# Altium PCB MicroLedController.PcbDoc
Units mm, origin at the board's own origin, x right, y up, seen from the top; angles counter-clockwise.
Board outline 51.07 x 23.13 mm, 2 copper layers (Top, Bottom), stack 0.27 mm thick; 35 components, 28 nets, 154 pads, 55 vias.
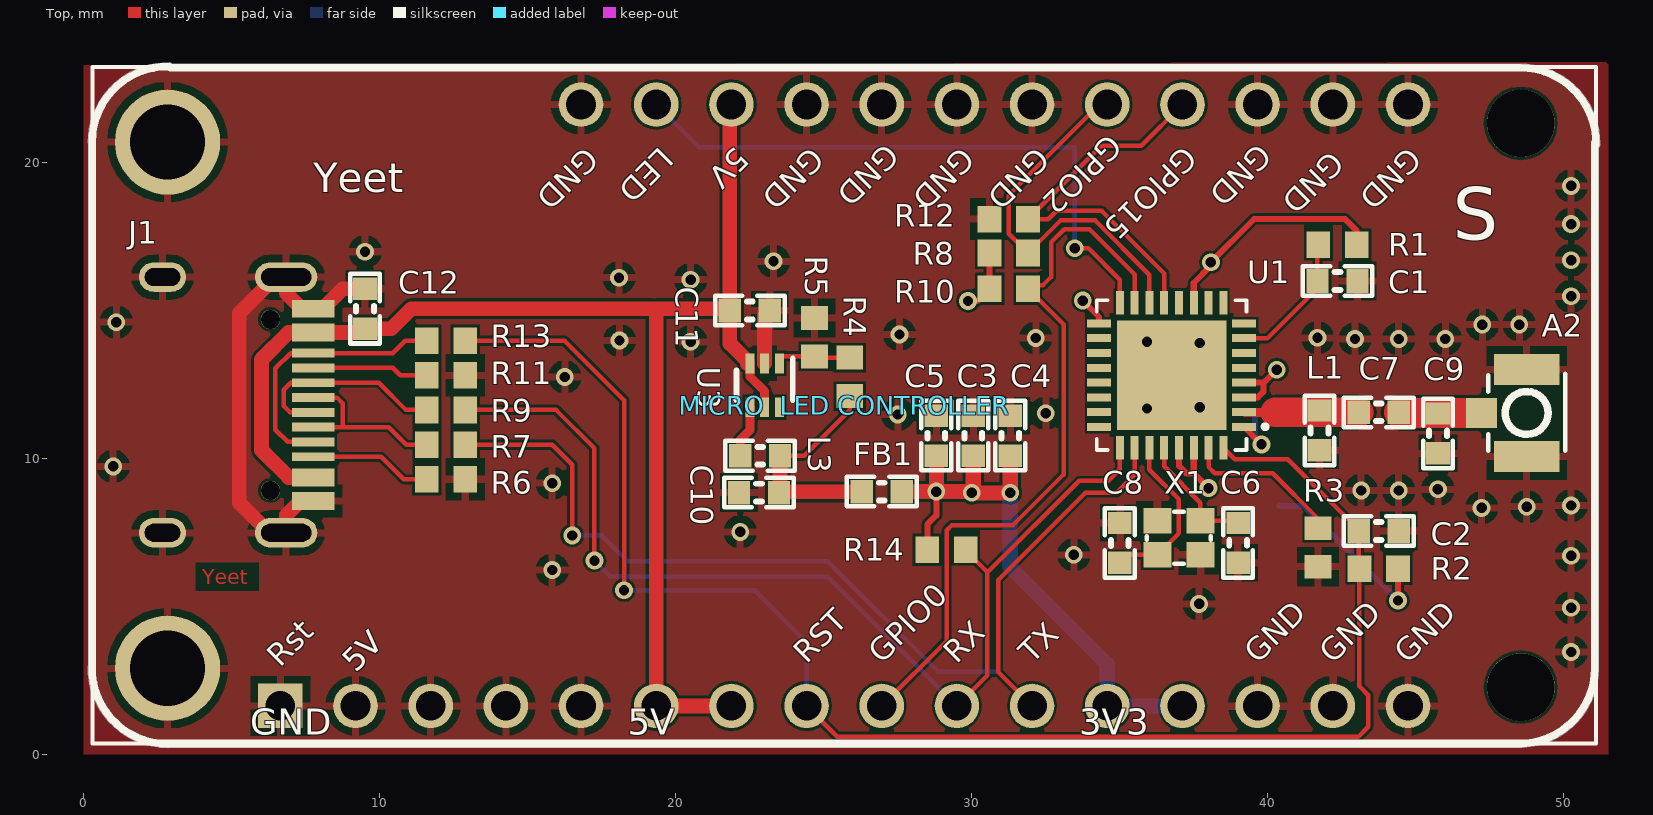
[diagram p0: Top view]
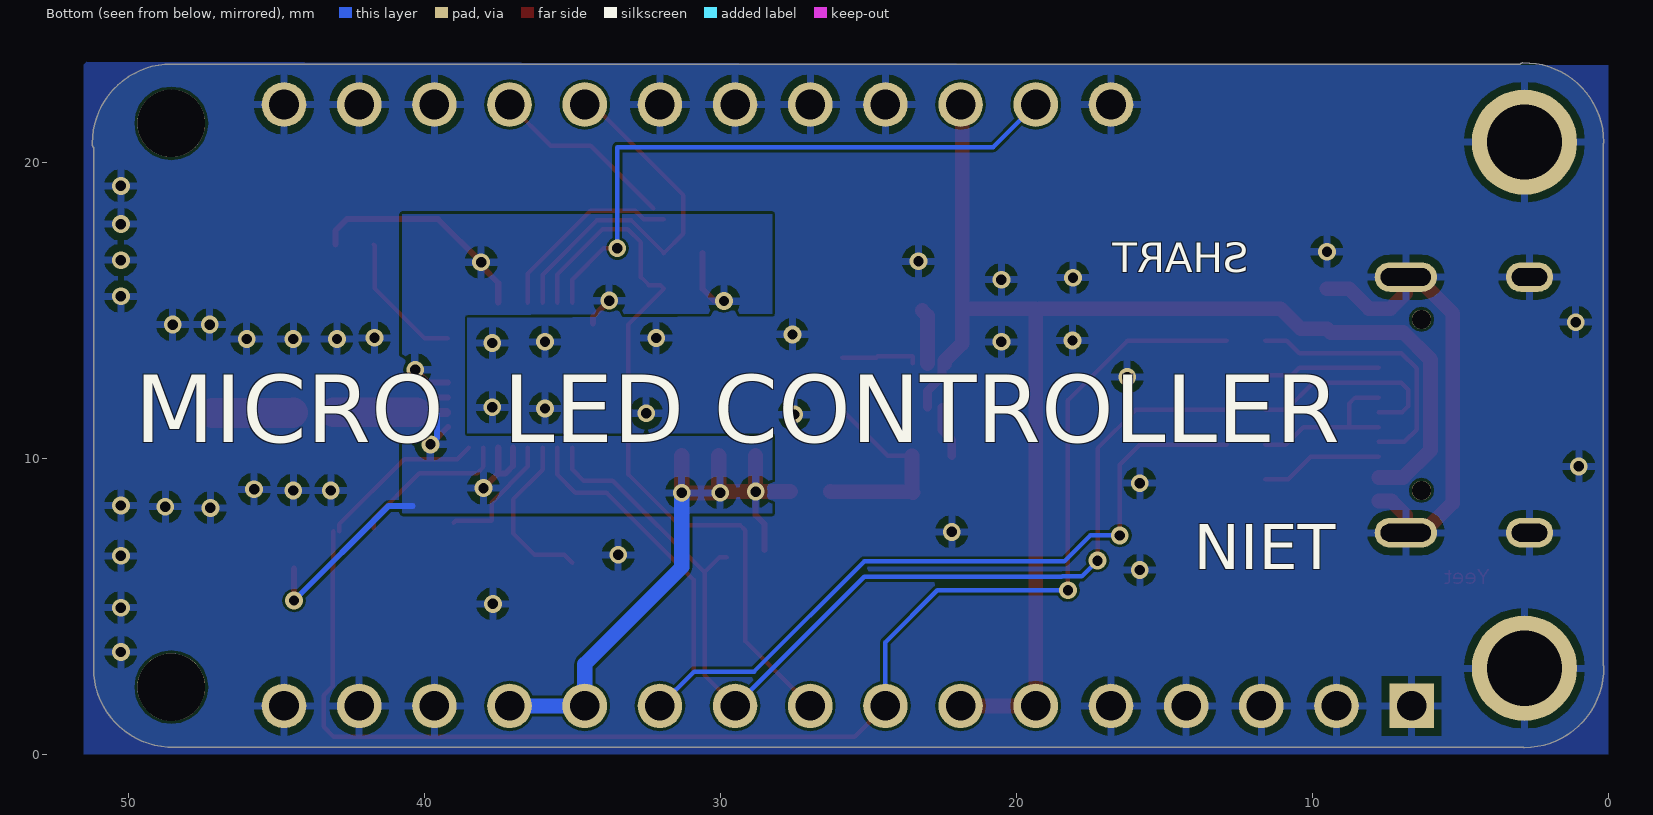
[diagram p1: Bottom view, seen from below]
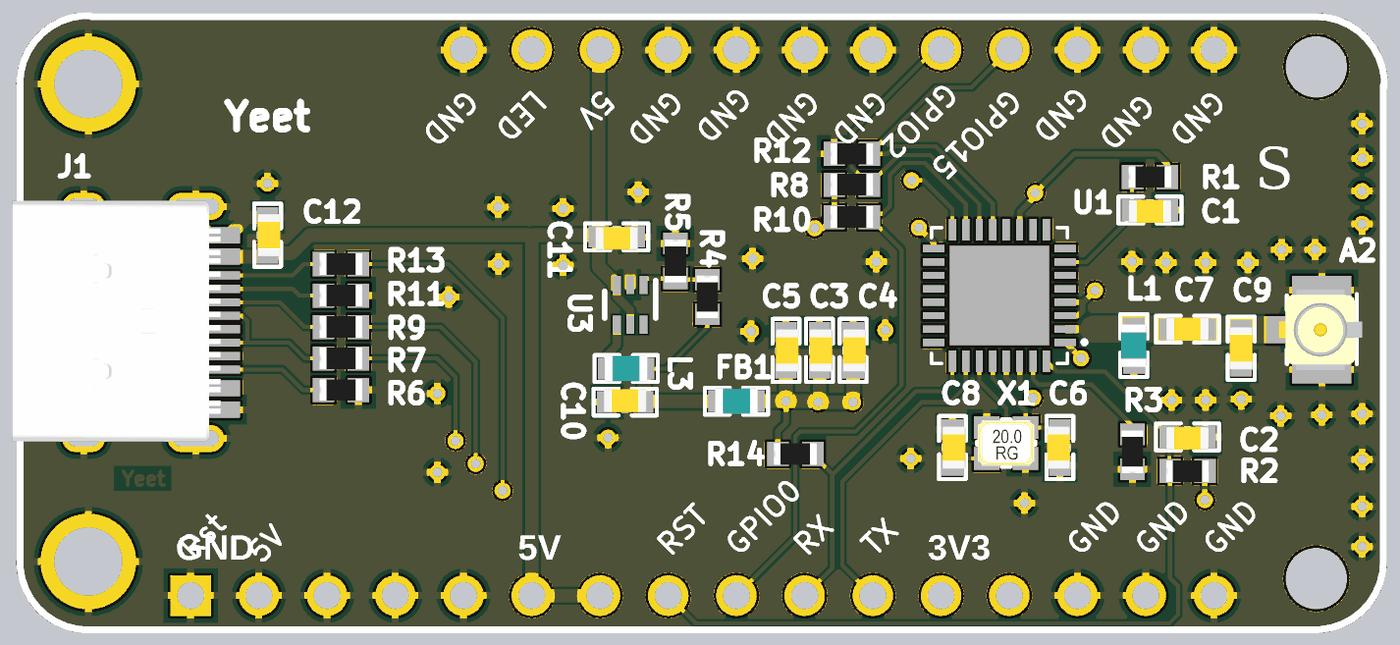
[diagram p2: 3D render of the assembled board from above, using the file's embedded part models]

## Layer stack, top to bottom
Top Solder: solder mask 0.0102, Solder Resist, Dk 3.5
Top: signal copper 0.035
Prepreg: core 0.2, 7628, Dk 4.2
Bottom: signal copper 0.035
Bottom Solder: solder mask 0.0102, Solder Resist, Dk 3.5

## Board outline
2.828,0.232 cw(c2.828,2.91) 0.15,2.964 cw(c0.278,2.961) 0.16,3.01 0.16,20.64 cw(c0.277,20.69) 0.15,20.69 cw(c2.828,20.69) 2.881,23.367 cw(c2.879,23.24) 2.97,23.329 48.538,23.329 cw(c48.538,20.651) 51.215,20.651 cw(c48.538,20.651) 51.215,20.597 cw(c51.088,20.6) 51.175,20.508 51.175,2.92 cw(c48.498,2.92) 48.446,0.243 cw(c48.498,2.92) 48.444,0.243 48.446,0.243 2.878,0.243 cw(c2.828,0.36)

## Design rules (kind name [scope] priority, off if disabled: settings)
Clearance [All] p1: gap=0.089 ignorepadtopadclearanceinfootprint=TRUE
ComponentClearance [All] p1 off: gap=0.254 collisioncheckmode=3 verticalgap=0.254 showdistances=FALSE
DiffPairsRouting [All] p1: maxlimit=0.254 minlimit=0.089 mostfreqgap=0.2 toplayer_minwidth=0.089 toplayer_maxwidth=0.381 toplayer_prefwidth=0.15 bottomlayer_minwidth=0.089 bottomlayer_maxwidth=0.381 bottomlayer_prefwidth=0.15 maxuncoupledlength=12.7
MatchedLengths usb [All] p1: tolerance=1 checknetsindiffpair=FALSE checkdiffpairvsdiffpair=TRUE checkxsignals=TRUE checkothers=TRUE
PolygonConnect [All] p1: connectstyle=Relief reliefconductorwidth=0.254 reliefentries=4 polygonreliefangle="90 Angle" airgapwidth=0.254
RoutingVias [All] p1: holewidth=0.35 width=0.6 viastyle="Through Hole" minholewidth=0.2 minwidth=0.45 maxholewidth=6.3 maxwidth=1.27
SolderMaskExpansion [All] p1: expansion=0.102 istentingtop=FALSE
Width [All] p1: maxlimit=1 minlimit=0.127 preferedwidth=0.2
28 further rules are at their usual default settings.

## Components (designator, comment, footprint, x,y, rotation, side; value= is the part's Value field where it differs from the comment)
A2 "U.FL-R-SMT-1" "COAXIAL RF U.FL-R-SMT-1" 48.75,11.538 r270 top locked
C1 "100nF" C0603 42.355,15.997 r180 top value=100pF
C2 "100nF" C0603 43.75,7.548 r180 top value=100pF
C3 "1uF" C0603 30.05,10.769 r270 top value=100pF
C4 "100nF" C0603 31.3,10.769 r270 top value=100pF
C5 "1uF" C0603 28.8,10.769 r270 top value=100pF
C6 "10pF" C0603 39,7.15 r90 top locked value=100pF
C7 "8.2pF" CAPC1608X06L 43.75,11.56 r0 top locked value=100pF
C8 "10pF" C0603 35,7.15 r270 top locked value=100pF
C9 "2.4pF" CAPC1608X06L 45.75,10.85 r90 top locked value=100pF
C10 "22uF" C0603 22.814,8.847 r0 top value=100pF
C11 "4.7uF" C0603 22.5,14.997 r180 top value=100pF
C12 "10uF" C0603 9.5,15.06 r270 top locked value=100pF
FB1 "Ferrite" IND0603 26.958,8.88 r180 top value=120R/0.55A
J1 "USB-C" TYPE-C-31-M-12 7.75,15.06 r270 top locked
L1 "1.5nH" IND0603 41.75,10.95 r90 top locked value=120R/0.55A
L3 "1uH" IND0603 22.85,10.093 r0 top value=120R/0.55A
"MICRO  LED CONTROLLER" "2821" *XCVR_2821 25.688,11.8 r0 top (schematic designator U2)
R1 "10K" RES0603R 42.355,17.228 r0 top value=0R
R2 "10K" RES0603R 43.75,6.278 r0 top value=0R
R3 "12K" RES0603R 41.7,6.995 r90 top value=0R
R4 "453K" RES0603R 25.875,12.76 r270 top value=0R
R5 "100K" RES0603R 24.685,14.097 r270 top value=0R
R6 "1K" RES0603R 12.235,9.298 r0 top locked value=0R
R7 "0R" RES0603R 12.235,10.469 r0 top locked
R8 "10K" RES0603R 31.25,16.941 r0 top value=0R
R9 "0R" RES0603R 12.235,11.64 r0 top locked
R10 "10K" RES0603R 31.25,15.735 r0 top value=0R
R11 "1K" RES0603R 12.235,12.811 r0 top locked value=0R
R12 "10K" RES0603R 31.25,18.087 r0 top value=0R
R13 "0R" RES0603R 12.235,13.982 r0 top locked
R14 "100K" RES0603R 29.15,6.916 r0 top value=0R
U1 "ESP8285" *QFN50P500X500X80-33N 36.75,12.813 r180 top locked
U3 "TLV62568ADRLR" DRL0006A 23,12.473 r270 top value=N/A
X1 "26MHZ" BT-XTAL_2016 37,7.32 r0 top locked value=32MHz

## Footprints (in the part's own frame and the unit in brackets; to place one, negate y for a bottom-side part, rotate by r counter-clockwise, add the part's x,y. Pads: shape width x height; smd on the part's side, far side on the other; paste and mask are expansions set on the pad)
*QFN50P500X500X80-33N [mm]
  rect 0.8x0.27 smd: 1(-2.45,1.75) 2(-2.45,1.25) 3(-2.45,0.75) 4(-2.45,0.25) 5(-2.45,-0.25) 6(-2.45,-0.75) 7(-2.45,-1.25) 8(-2.45,-1.75) 17(2.45,-1.75) 18(2.45,-1.25) 19(2.45,-0.75) 20(2.45,-0.25) 21(2.45,0.25) 22(2.45,0.75) 23(2.45,1.25) 24(2.45,1.75)
  rect 0.27x0.8 smd: 9(-1.75,-2.45) 10(-1.25,-2.45) 11(-0.75,-2.45) 12(-0.25,-2.45) 13(0.25,-2.45) 14(0.75,-2.45) 15(1.25,-2.45) 16(1.75,-2.45) 25(1.75,2.45) 26(1.25,2.45) 27(0.75,2.45) 28(0.25,2.45) 29(-0.25,2.45) 30(-0.75,2.45) 31(-1.25,2.45) 32(-1.75,2.45)
  rect 3.7x3.7 smd: 33(0,0)
  silkscreen extent -3.24,-2.53 2.53,2.53, body extent -2.53,-2.53 2.53,2.53, height 0.85
*XCVR_2821 [mm]
  rect 1.508x1.508 hole 1: 1(-19.05,-10.16)
  round 1.508 hole 1: 2(-16.51,-10.16) 3(-13.97,-10.16) 4(-11.43,-10.16) 5(-8.89,-10.16) 6(-6.35,-10.16) 7(-3.81,-10.16) 8(-1.27,-10.16) 9(1.27,-10.16) 10(3.81,-10.16) 11(6.35,-10.16) 12(8.89,-10.16) 13(11.43,-10.16) 14(13.97,-10.16) 15(16.51,-10.16) 16(19.05,-10.16) 17(-8.89,10.16) 18(-6.35,10.16) 19(-3.81,10.16) 20(-1.27,10.16) 21(1.27,10.16) 22(3.81,10.16) 23(6.35,10.16) 24(8.89,10.16) 25(11.43,10.16) 26(13.97,10.16) 27(16.51,10.16) 28(19.05,10.16)
  round 2.286 hole 2.286 unplated: None(22.86,-9.525) None(22.86,9.525)
  round 3.556 hole 2.54: S1(-22.86,-8.89) S2(-22.86,8.89)
  silkscreen extent -25.4,-11.43 25.4,11.43
BT-XTAL_2016 [mm]
  rect 0.95x0.85 smd: 1(-0.725,-0.575) 2(0.725,-0.575) 3(0.725,0.575) 4(-0.725,0.575)
  silkscreen extent -1.08,-0.88 1.08,0.88, body extent -1.05,-0.85 1.05,0.85, height 0.56
C0603 [mm]
  rect 0.75x0.8 smd: 1(-0.675,0) 2(0.675,0)
  silkscreen extent -1.17,-0.5 1.17,0.5, body extent -0.8,-0.38 0.8,0.48, height 0.8
CAPC1608X06L [mm]
  rect 0.75x0.8 smd: 1(-0.675,0) 2(0.675,0)
  silkscreen extent -1.17,-0.5 1.17,0.5, body extent -0.8,-0.43 0.8,0.43, height 0.8
"COAXIAL RF U.FL-R-SMT-1" [mm]
  rect 1x1.05 smd: 1(0,-1.525)
  rect 1.05x2.2 smd: 2(-1.475,0) 2(1.475,0)
  Top pour cut-out: 0.85,1.3 -0.85,1.3 -0.85,-1.525 0.85,-1.525
  silkscreen extent -1.32,-1.3 1.28,1.3, body extent -1.5,-1.6 1.5,1.5, height 1.25
DRL0006A [mm]
  rect 0.67x0.3 smd paste+0 mask+0.051: 1(-0.74,0.5) 2(-0.74,0) 3(-0.74,-0.5) 4(0.74,-0.5) 5(0.74,0) 6(0.74,0.5)
  silkscreen extent -0.9,-0.95 0.5,0.95, body extent -0.76,-0.76 0.76,0.89, height 0.25
IND0603 [mm]
  rect 0.75x0.8 smd: 1(-0.675,0) 2(0.675,0)
  silkscreen extent -1.17,-0.5 1.17,0.5, body extent -0.8,-0.48 0.8,0.48, height 0.8
RES0603R [mm] "resistor 0603 reflow soldering"
  rect 0.8x0.9 smd: 1(-0.65,0) 2(0.65,0)
  body extent -0.8,-0.4 0.8,0.4, height 0.45
TYPE-C-31-M-12 [mm]
  rect 0.6x1.45 smd: 1(0,0) 1(6.5,0) 2(0.8,0) 2(5.7,0)
  rect 0.3x1.45 smd: 3(1.5,0) 4(2,0) 5(2.5,0) 6(3,0) 7(3.5,0) 8(4,0) 9(4.5,0) 10(5,0)
  oval 1x2.1 hole 1.7 slot 0.6 at 0 deg: 11(-1.07,-0.915) 11(7.57,-0.915)
  oval 1x1.6 hole 1.2 slot 0.6 at 0 deg: 11(-1.07,-5.095) 11(7.57,-5.095)
  round 0.65 hole 0.65: 12(0.36,-1.445) 12(6.14,-1.445)
  body extent -1.27,-7.75 7.68,0, height 3.27

## Part data
A2: "ONN U.FL RCPT STR 50 OHM SMD", Manufacturer="Hirose Electric Co Ltd", Part number IPS=N.A., Supplier Part Number 1=H11891DKR-ND, Artikkelnr Noca=N.A., ComponentLink1Description=Datasheet, ComponentLink1URL=https://media.digikey.com/pdf/Data%20Sheets/Hirose%20PDFs/UFL%20Series.pdf, ComponentLink2Description="Supplier link", Footprint Doc="COAXIAL RF U.FL-R-SMT-1", LatestRevisionDate=2018-05-07, Manufacturer Part Number=U.FL-R-SMT-1, Part Number=U.FL-R-SMT-1, Pin Count=3, Published=2018-05-07, Publisher="Nordic Semiconductor", Supplier 1=Digi-Key
C1 C2 C3 C4 C5 C6 C7 C8 C9 C10 C11 C12: library part CAP, "Capacitor", Published=8-Jun-2000, Publisher="Altium Limited", Revision="July-2002: Re-released for DXP Platform."
FB1: "Ferrite Bead, 120 Ohm @ 100MHz, 500mA, 250 mOhm Max", Manufacturer=Murata, Manufacturer Part Number=BLM15AG121SN1D, Part Number=FB0402-120R@100M-500mA, Part number IPS=N.A., Supplier Part Number 1=490-1005-1-ND, Artikkelnr Noca=33029317, ComponentLink1Description=Datasheet, ComponentLink2Description="Supplier link", Footprint Doc=0402, HelpURL=http://search.murata.co.jp/Ceramy/image/img/PDF/ENG/L0110S0100BLM15A_SN.pdf, LatestRevisionDate=2014-01-10, Note="Chip EMIFIL Inductor Type Chip Ferrite Bead", Pin Count=2, Published=2011-11-14, Publisher="Nordic Semiconductor", Supplier 1=Digi-Key, Supplier 2=Farnell, Supplier Part Number 2=151-5760
L1 L3: "Inductor", Manufacturer=Murata, Manufacturer Part Number=BLM15AG121SN1D, Part Number=FB0402-120R@100M-500mA, Part number IPS=N.A., Supplier Part Number 1=490-1005-1-ND, Artikkelnr Noca=33029317, ComponentLink1Description=Datasheet, ComponentLink2Description="Supplier link", Footprint Doc=0402, HelpURL=http://search.murata.co.jp/Ceramy/image/img/PDF/ENG/L0110S0100BLM15A_SN.pdf, LatestRevisionDate=2014-01-10, Note="Chip EMIFIL Inductor Type Chip Ferrite Bead", Pin Count=2, Published=2011-11-14, Publisher="Nordic Semiconductor", Supplier 1=Digi-Key, Supplier 2=Farnell, Supplier Part Number 2=151-5760
"MICRO  LED CONTROLLER": "Adafruit Feather HUZZAH with ESP8266 WiFi", Package=None, Availability=Unavailable, MF="Adafruit Industries", MP=2821, Price=None, SnapEDA_Link=https://www.snapeda.com/parts/2821/Adafruit%20Industries%20LLC/view-part/?ref=snap
R1 R2 R3 R4 R5 R6 R7 R8 R9 R10 R11 R12 R13 R14: "Resistor, ±5%, 0.05W", Part Number=R0201-0R, Part number IPS=00000003245, Artikkelnr Noca=N.A., ComponentLink1Description=Datasheet, ComponentLink2Description="Supplier link", Footprint Doc=0201, LatestRevisionDate=2017-11-09, Note="Chip Res 5%", Pin Count=2, Published=2014-11-13, Publisher="Nordic Semiconductor"
U1: library part ESP8266EX, "ESP8266EX", Package="VFQFN-32 Espressif Systems", Availability=Unavailable, ComponentLink1Description=datasheet, ComponentLink1URL=https://www.espressif.com/sites/default/files/documentation/0a-esp8285_datasheet_en.pdf, MF="Espressif Systems", MP=ESP8266EX, Price=None, SnapEDA_Link=https://www.snapeda.com/parts/ESP8266EX/Espressif%20Systems/view-part/555861/?ref=snap
U3: Manufacturer Name="Texas Instruments", Manufacturer Part Number=TLV62568ADRLR, PackageReference=TLV62568ADRLR
X1: "X201626MOD4SI", Manufacturer=Golledge, Manufacturer Part Number=MP06003, Part Number=XTAL_SMD2016_32MHz_8pF_Golledge, Part number IPS=N.A., Artikkelnr Noca=22010050, ComponentLink1Description=Datasheet, ComponentLink2Description="Supplier link", Footprint Doc=XTAL_2016, HelpURL=\\hizz\pro\app9717\Datasheet\crystals\Golledge\mp06003.pdf, LatestRevisionDate=2016-11-02, Note="XTAL SMD 32.000MHz", Pin Count=4, Published=2016-11-02, Publisher="Nordic Semiconductor", Supplier 1="Link Nordic"

## Via types
v1: diameter 0.6, hole 0.35, Top to Bottom, 55 vias

## Nets (pads, with @x,y where several pads share a name; then routed paths per layer and width w, separated by ;. In a path a pad name is that pad's centre, name@x,y a point inside that pad or via, vN(x,y) a via of type N, cw(c..) or ccw(c..) an arc to the next point about the centre after c; other vN are vias at no path point)
3.3V: C10.2 FB1.2 L3.2 R4.2 | length 7.5
  Top w0.152: L3.2 24.343,10.093 25.875,11.625 R4.2
  Top w0.5: C10.2 C10.2@23.515,8.874 ; L3.2 23.525,8.884 C10.2@23.515,8.874 ; FB1.2 26.276,8.874 C10.2@23.515,8.874
3V3: "MICRO  LED CONTROLLER.12" "MICRO  LED CONTROLLER.13" C3.2 C4.2 C5.2 FB1.1 R1.2 R2.2 R8.1 R10.1 R14.1 U1.1 U1.3 U1.4 U1.11 U1.17 U1.29 U1.30 | length 45.1
  Top w0.203: 28.403,8.88 28.475,8.808 ; R14.1 28.5,7.779 28.8,8.079 v1(28.8,8.88) ; v1(29.873,15.319) 30.184,15.319 R10.1 R8.1 ; v1(33.75,15.335) 34.3,14.785 U1.17 ; U1.29 37,9.75 37.25,9.5 37.5,9.5 ; U1.30 37.5,9.5 ; U1.11 37.5,15.93 38.08,16.51 v1(38.08,16.63) 39.537,18.087 42.613,18.087 43.005,17.695 R1.2 ; v1(38,9) 37.5,9.5 ; U1.1 v1(39.787,10.476) ; U1.3 39.663,12.063 39.85,12.25 39.85,12.5 39.787,12.563 ; U1.4 39.787,12.563 ; v1(40.307,13) 39.87,12.563 39.787,12.563 ; v1(44.4,5.2) R2.2
  Top w0.508: FB1.1 28.403,8.88 v1(28.8,8.88) ; C5.2 v1(28.8,8.88) ; C3.2 30.05,8.89 v1(30,8.84) ; C4.2 v1(31.3,8.84) v1(30,8.84) ; v1(28.8,8.88) 29.96,8.88 v1(30,8.84)
  Bottom w0.203: 39.575,11.51 39.575,10.688 v1(39.787,10.476) ; 40.4,8.397 41.203,8.397 v1(44.4,5.2)
  Bottom w0.508: v1(31.3,8.84) 31.3,6.326 34.578,3.048 34.578,1.64 37.118,1.64
5V: "MICRO  LED CONTROLLER.6" "MICRO  LED CONTROLLER.7" "MICRO  LED CONTROLLER.19" C11.2 C12.2 J1.2 U3.3 U3.5 | length 48.3
  Top w0.3: U3.3 22.5,12.77 23,12.27 U3.5
  Top w0.5: J1.2@7.75,9.36 6.915,9.36 6,10.275 6,13.345 6.915,14.26 7.75,14.26 9.375,14.26 C12.2 10.385,14.385 11.06,15.06 19.2,15.06 ; 21.878,1.64 19.338,1.64 19.338,15.06 21.762,15.06 C11.2 ; 21.878,21.96 21.825,21.907 C11.2 ; U3.3@22.411,13.213 22.411,13.302 21.825,13.888 C11.2
EN: C1.2 R1.1 U1.7 | length 4.7
  Top w0.152: U1.7 39.989,14.063 41.68,15.754 C1.2 41.68,17.203 R1.1
GND: "MICRO  LED CONTROLLER.1" "MICRO  LED CONTROLLER.2" "MICRO  LED CONTROLLER.3" "MICRO  LED CONTROLLER.4" "MICRO  LED CONTROLLER.5" "MICRO  LED CONTROLLER.14" "MICRO  LED CONTROLLER.15" "MICRO  LED CONTROLLER.16" "MICRO  LED CONTROLLER.17" "MICRO  LED CONTROLLER.20" "MICRO  LED CONTROLLER.21" "MICRO  LED CONTROLLER.22" "MICRO  LED CONTROLLER.23" "MICRO  LED CONTROLLER.26" "MICRO  LED CONTROLLER.27" "MICRO  LED CONTROLLER.28" "MICRO  LED CONTROLLER.S1" "MICRO  LED CONTROLLER.S2" A2.2 C1.1 C2.1 C3.1 C4.1 C5.1 C6.1 C8.1 C9.1 C10.1 C11.1 C12.1 J1.1 J1.11 L1.1 R3.1 R5.1 R6.2 R11.2 R12.1 U1.33 U3.2 X1.2 X1.4 | length 17.8
  Top w0.5: J1.1@7.75,8.56 7.31,8.56 6.835,8.085 6.835,7.49 6.26,7.49 5.25,8.5 5.25,14.91 6.47,16.13 6.835,16.13 6.835,15.58 7.355,15.06 7.75,15.06 8.075,15.06 8.75,15.735 C12.1 ; U3.2 23,14.822 C11.1
  other v1: 50.25,3.46 50.25,4.96 37.681,5.087 15.824,6.231 50.25,6.71 33.449,6.745 22.175,7.519 47.225,8.33 48.75,8.37 50.25,8.41 43.155,8.92 44.425,8.92 45.75,8.96 15.824,9.165 0.988,9.732 27.5,11.485 32.5,11.53 35.92,11.691 37.7,11.731 16.25,12.755 37.7,13.902 20.5,13.942 35.92,13.942 18.098,13.985 42.95,14.038 44.425,14.038 46,14.038 32.165,14.069 41.68,14.078 27.559,14.191 47.25,14.523 48.5,14.523 1.094,14.606 50.25,15.478 20.5,16.041 18.082,16.108 23.302,16.663 50.25,16.7 9.5,16.985 50.25,17.92 50.25,19.21
GPIO0: "MICRO  LED CONTROLLER.9" R10.2 U1.15 | length 25.1
  Top w0.152: 26.978,1.64 26.958,1.64 29.15,3.832 29.15,7.569 29.33,7.75 31.393,7.75 33.1,9.457 33.1,14.535 R10.2 32.025,15.86 32.407,15.86 32.677,16.13 32.677,17.302 33.125,17.75 33.975,17.75 35.5,16.225 U1.15
GPIO2: "MICRO  LED CONTROLLER.24" R8.2 U1.14 | length 13.1
  Top w0.152: 34.578,21.96 34.31,21.96 31.25,18.9 31.25,17.591 R8.2 33,18.041 34.172,18.041 36,16.213 U1.14
GPIO12: U1.10
GPIO13: U1.12
GPIO14: U1.9
GPIO15: "MICRO  LED CONTROLLER.25" R12.2 U1.13 | length 12.9
  Top w0.152: R12.2 32.587,18.087 32.866,18.366 34.384,18.366 36.5,16.25 U1.13 ; R12.2@32.263,18.45 34.376,20.563 35.721,20.563 37.118,21.96
GPIO16: U1.8
LED: "MICRO  LED CONTROLLER.18" U1.16 | length 20.9
  Top w0.152: v1(33.475,17.1) 33.941,17.1 35,16.041 U1.16
  Bottom w0.152: 19.338,21.96 20.775,20.523 33.475,20.523 v1(33.475,17.1)
NetA2_1: A2.1 C7.2 C9.2 | length 2.7
  Top w1: C7.2 44.447,11.538 A2.1@47.15,11.538
NetC6_2: C6.2 U1.28 X1.3 | length 4.3
  Top w0.152: U1.28 36.5,9.733 37.725,8.508 X1.3 38.93,7.895 C6.2
NetC7_1: C7.1 L1.2 U1.2 | length 3.8
  Top w0.3: U1.2@39.24,11.56 40.25,11.56
  Top w1: 40.25,11.56 C7.1
NetC8_2: C8.2 U1.27 X1.1 | length 5.7
  Top w0.152: C8.2 35.27,6.745 X1.1 37,7.47 37,8.622 36,9.622 U1.27
NetJ1_3: J1.3 J1.9 R13.1 | length 9
  Top w0.152: J1.9 6.882,10.56 6.47,10.972 6.47,13.044 6.986,13.56 J1.3 10.439,13.56 10.861,13.982 R13.1
NetJ1_4: J1.4 R11.1 | length 3.9
  Top w0.152: J1.4 10.44,13.06 10.689,12.811 R11.1
NetJ1_5: J1.5 J1.7 R9.1 | length 7
  Top w0.152: J1.7 6.963,11.56 6.75,11.773 6.75,12.326 6.984,12.56 J1.5 9.963,12.56 10.882,11.64 R9.1
NetJ1_6: J1.6 J1.8 R7.1 | length 6
  Top w0.152: J1.8 8.75,11.06 ; J1.6 8.55,12.06 8.75,11.86 8.75,11.06 ; R7.1 10.892,10.469 10.301,11.06 8.75,11.06
NetJ1_10: J1.10 R6.1 | length 4.2
  Top w0.152: J1.10 10.05,10.06 10.812,9.298 R6.1
NetL3_1: L3.1 U3.4 | length 1.8
  Top w0.3: L3.1 22.175,10.63 22.5,10.955 U3.4
NetR3_2: R3.2 U1.31 | length 5.4
  Top w0.152: U1.31 38,9.713 38.213,9.5 40.17,9.5 41.7,7.97 R3.2
NetR4_1: R4.1 R5.2 U3.1 | length 2.6
  Top w0.152: U3.1 23.5,13.447 R5.2 24.723,13.41 R4.1
RST: "MICRO  LED CONTROLLER.8" C2.2 R2.1 R13.2 U1.32 | length 53.6
  Top w0.152: R13.2 16.241,13.982 18.25,11.973 v1(18.25,5.55) ; 24.418,1.64 25.458,0.6 43.065,0.6 43.4,0.935 43.4,2 43.1,2.3 R2.1 43.075,6.303 C2.2 ; U1.32 38.887,9.976 40.68,9.976 42.88,7.776 C2.2@42.88,7.548
  Bottom w0.152: v1(18.25,5.55) 22.664,5.55 24.418,3.796 24.418,1.64
RXD0: "MICRO  LED CONTROLLER.10" R9.2 R14.2 U1.25 | length 35.5
  Top w0.152: R9.2 15.953,11.64 17.25,10.343 v1(17.25,6.55) ; 29.498,1.64 30.529,2.671 30.529,6.153 ; R14.2@29.775,6.657 30.025,6.657 30.529,6.153 ; U1.25 35,9.631 34.619,9.25 33.626,9.25 30.529,6.153
  Bottom w0.152: v1(17.25,6.55) 17.785,6.015 18.443,6.015 18.458,6 25.138,6 29.498,1.64
TXD0: "MICRO  LED CONTROLLER.11" R7.2 U1.26 | length 35.9
  Top w0.152: R7.2 15.824,10.469 16.5,9.793 v1(16.5,7.4) ; 32.038,1.64 30.9,2.778 30.9,5.9 33.84,8.84 34.894,8.84 35.5,9.446 U1.26
  Bottom w0.152: v1(16.5,7.4) 17.5,7.4 18.38,6.52 25.138,6.52 28.858,2.8 30.878,2.8 32.038,1.64
pads on no net: "MICRO  LED CONTROLLER.None" J1.12 U1.5 U1.6 U1.18 U1.19 U1.20 U1.21 U1.22 U1.23 U1.24 U3.6

## Polygon pours and split planes (outlines as drawn)
GND on Bottom "Bottom-GND 1" (solid, pour order 12): 0,23.287 0,0 51.5,0 51.5,23.4
3V3 on Bottom "Top-3V3" (solid, pour order 10): 40.75,18.25 40.75,12.388 39.658,12.388 39.658,11.1 39.82,11.1 40.444,10.476 40.75,10.476 40.75,8.17 40.73,8.149 28.25,8.149 28.25,18.25
no net on Bottom "Bottom-No Net" (solid, pour order 16): 38.694,11.675
GND on Bottom "Top-GND 1" (solid, pour order 8): 38.54,14.751 38.54,10.85 25.25,10.85 25.25,14.81
GND on Top "Top-GND" (solid, pour order 14): 0,23.287 0,0 51.5,0 51.5,23.4

## Other copper
Top:
  text "Yeet" at 4,5.75 h0.51

## Silkscreen, mask and mechanical layers (free items; w line width, h text height)
Top Overlay:
  lines w0.254: 0.277,20.69 cw(c2.828,20.69) 2.879,23.24 ; 0.278,2.961 ccw(c2.828,2.91) 2.828,0.36 ; 0.288,2.681 0.288,20.919 ; 2.599,0.37 48.549,0.37 ; 2.917,23.201 48.538,23.201 cw(c48.538,20.651) 51.088,20.6 ; 48.447,0.37 ccw(c48.498,2.92) 51.048,2.92 51.048,20.662
  text "Yeet" at 7.75,19 h1
  text "S" at 46.251,16.794 h3.05
Bottom Overlay:
  text "SHART" at 12.15,16.3 h1
  text "NIET" at 14.004,6.254 h1.52

## Text inside footprints (layer, text, board x,y; h text height)
"MICRO  LED CONTROLLER": Top Overlay "GND" at 5.626,0.37 h1.5; Top Overlay "GPIO2" at 34.619,21 h0.76 r225; Top Overlay "5V" at 18.369,0.37 h1.5; Top Overlay "3V3" at 33.623,0.37 h1.5; Top Overlay "GND" at 16.925,20.563 h0.76 r225; Top Overlay "LED" at 19.465,20.563 h0.76 r225; Top Overlay "5V" at 22.005,20.563 h0.76 r225; Top Overlay "GND" at 24.545,20.563 h0.76 r225; Top Overlay "GND" at 27.085,20.69 h0.76 r225; Top Overlay "GND" at 29.625,20.563 h0.76 r225; Top Overlay "GND" at 32.165,20.563 h0.76 r225; Top Overlay "GPIO15" at 37.152,20.6 h0.76 r225; Top Overlay "GND" at 42.105,20.425 h0.76 r225; Top Overlay "GND" at 39.658,20.69 h0.76 r225; Top Overlay "GND" at 44.738,20.563 h0.76 r225; Top Overlay "Rst" at 6.638,2.91 h0.76 r45; Top Overlay "5V" at 9.178,2.75 h0.76 r45; Top Overlay "5V" at 9.178,2.75 h0.76 r45; Top Overlay "RST" at 24.418,3.037 h0.76 r45; Top Overlay "GPIO0" at 26.958,3.037 h0.76 r45; Top Overlay "RX" at 29.498,3.037 h0.76 r45; Top Overlay "TX" at 32.038,3.037 h0.76 r45; Top Overlay "GND" at 39.658,3.037 h0.76 r45; Top Overlay "GND" at 42.198,3.037 h0.76 r45; Top Overlay "GND" at 44.738,3.037 h0.76 r45